# Altium PCB TEST-MODULE.PcbDoc
Units mm, origin at the board's own origin, x right, y up, seen from the top; angles counter-clockwise.
Board outline 70 x 64 mm, 2 copper layers (Top Layer, Bottom Layer), stack 1.571 mm thick; 31 components, 21 nets, 100 pads, 0 vias.
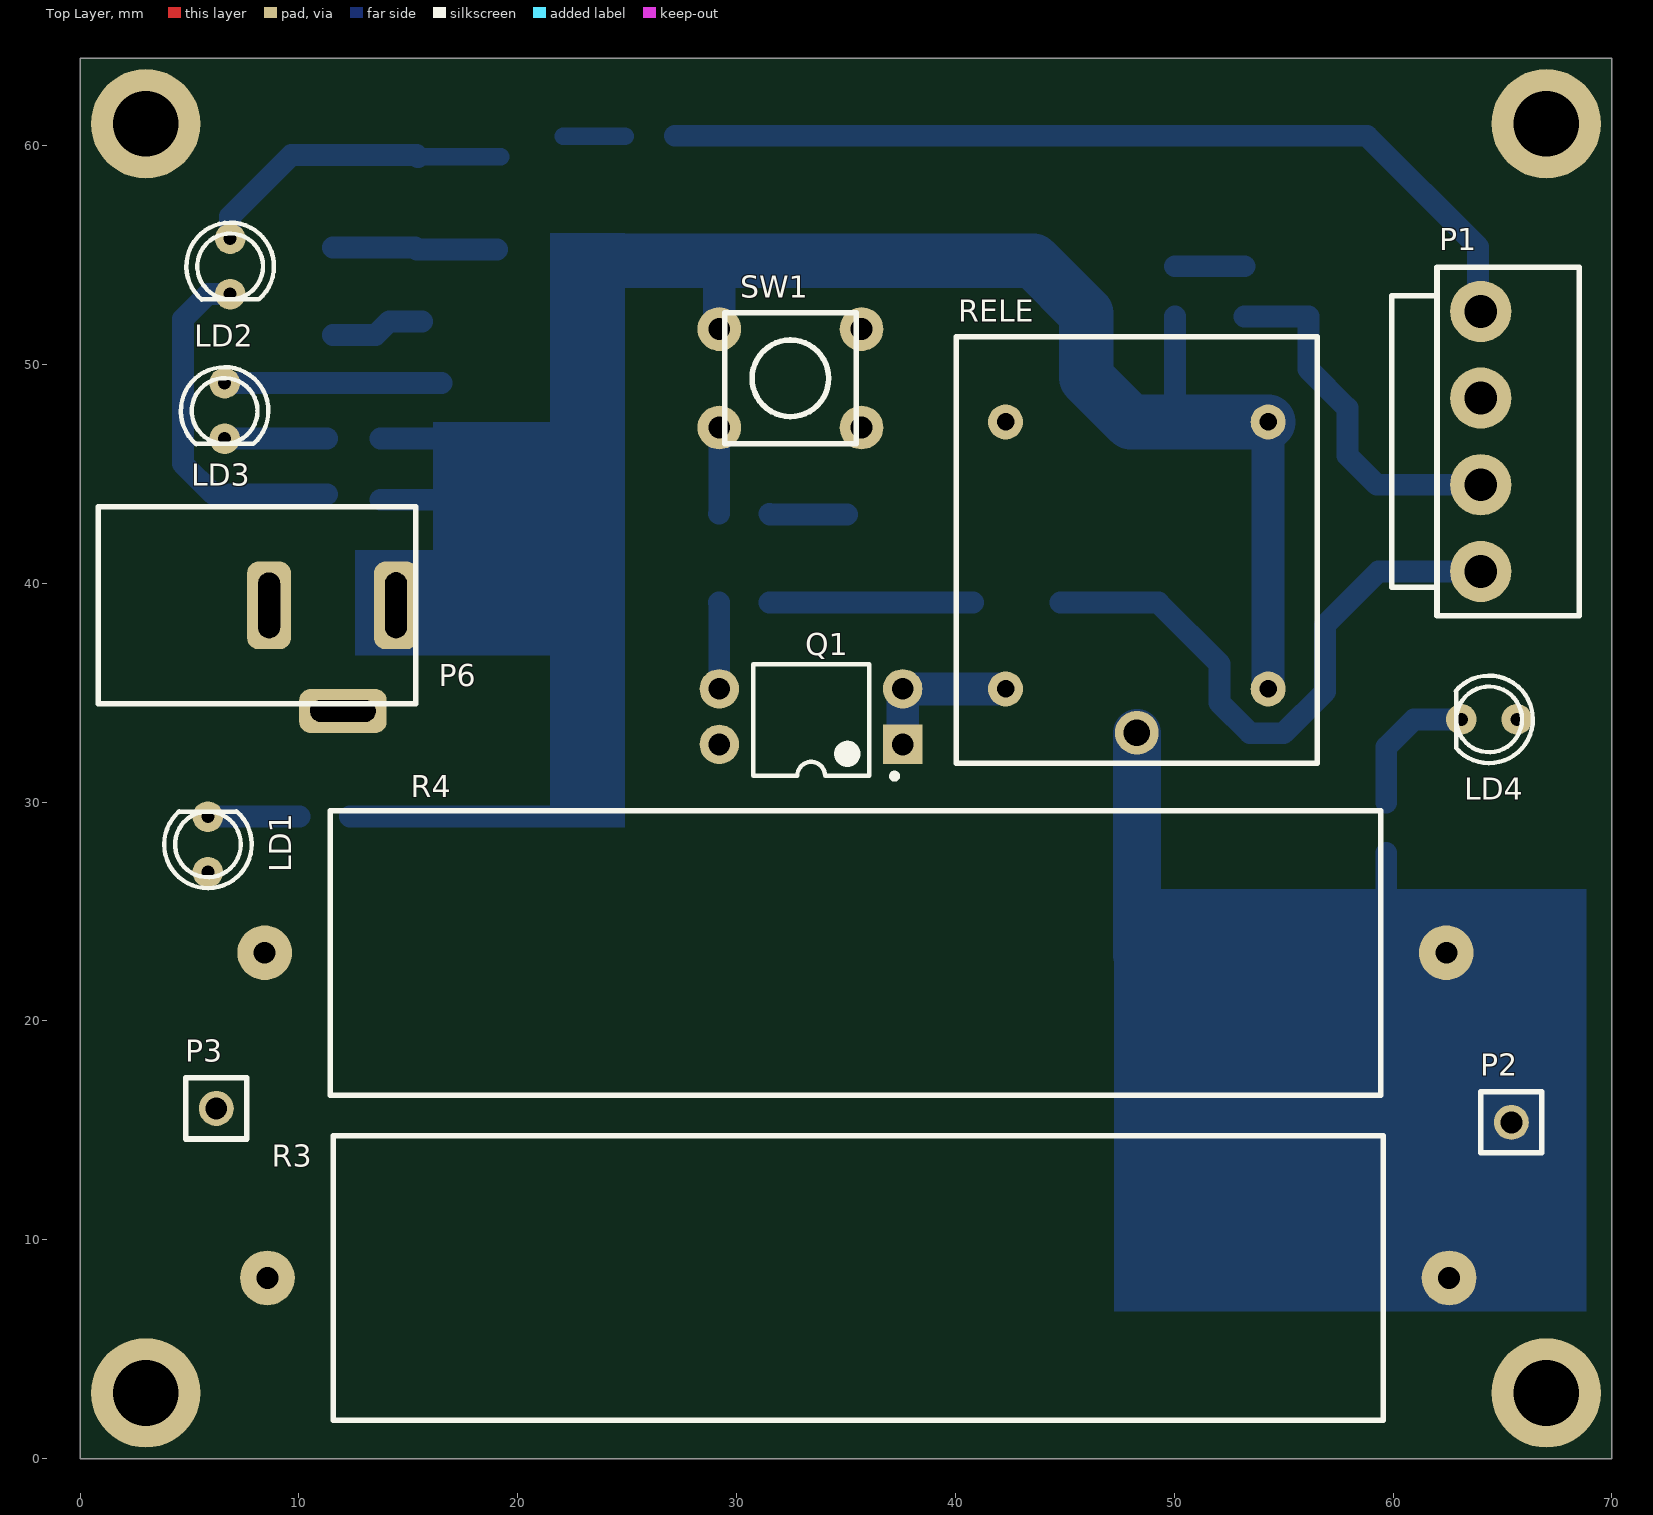
[diagram p0: Top Layer view]
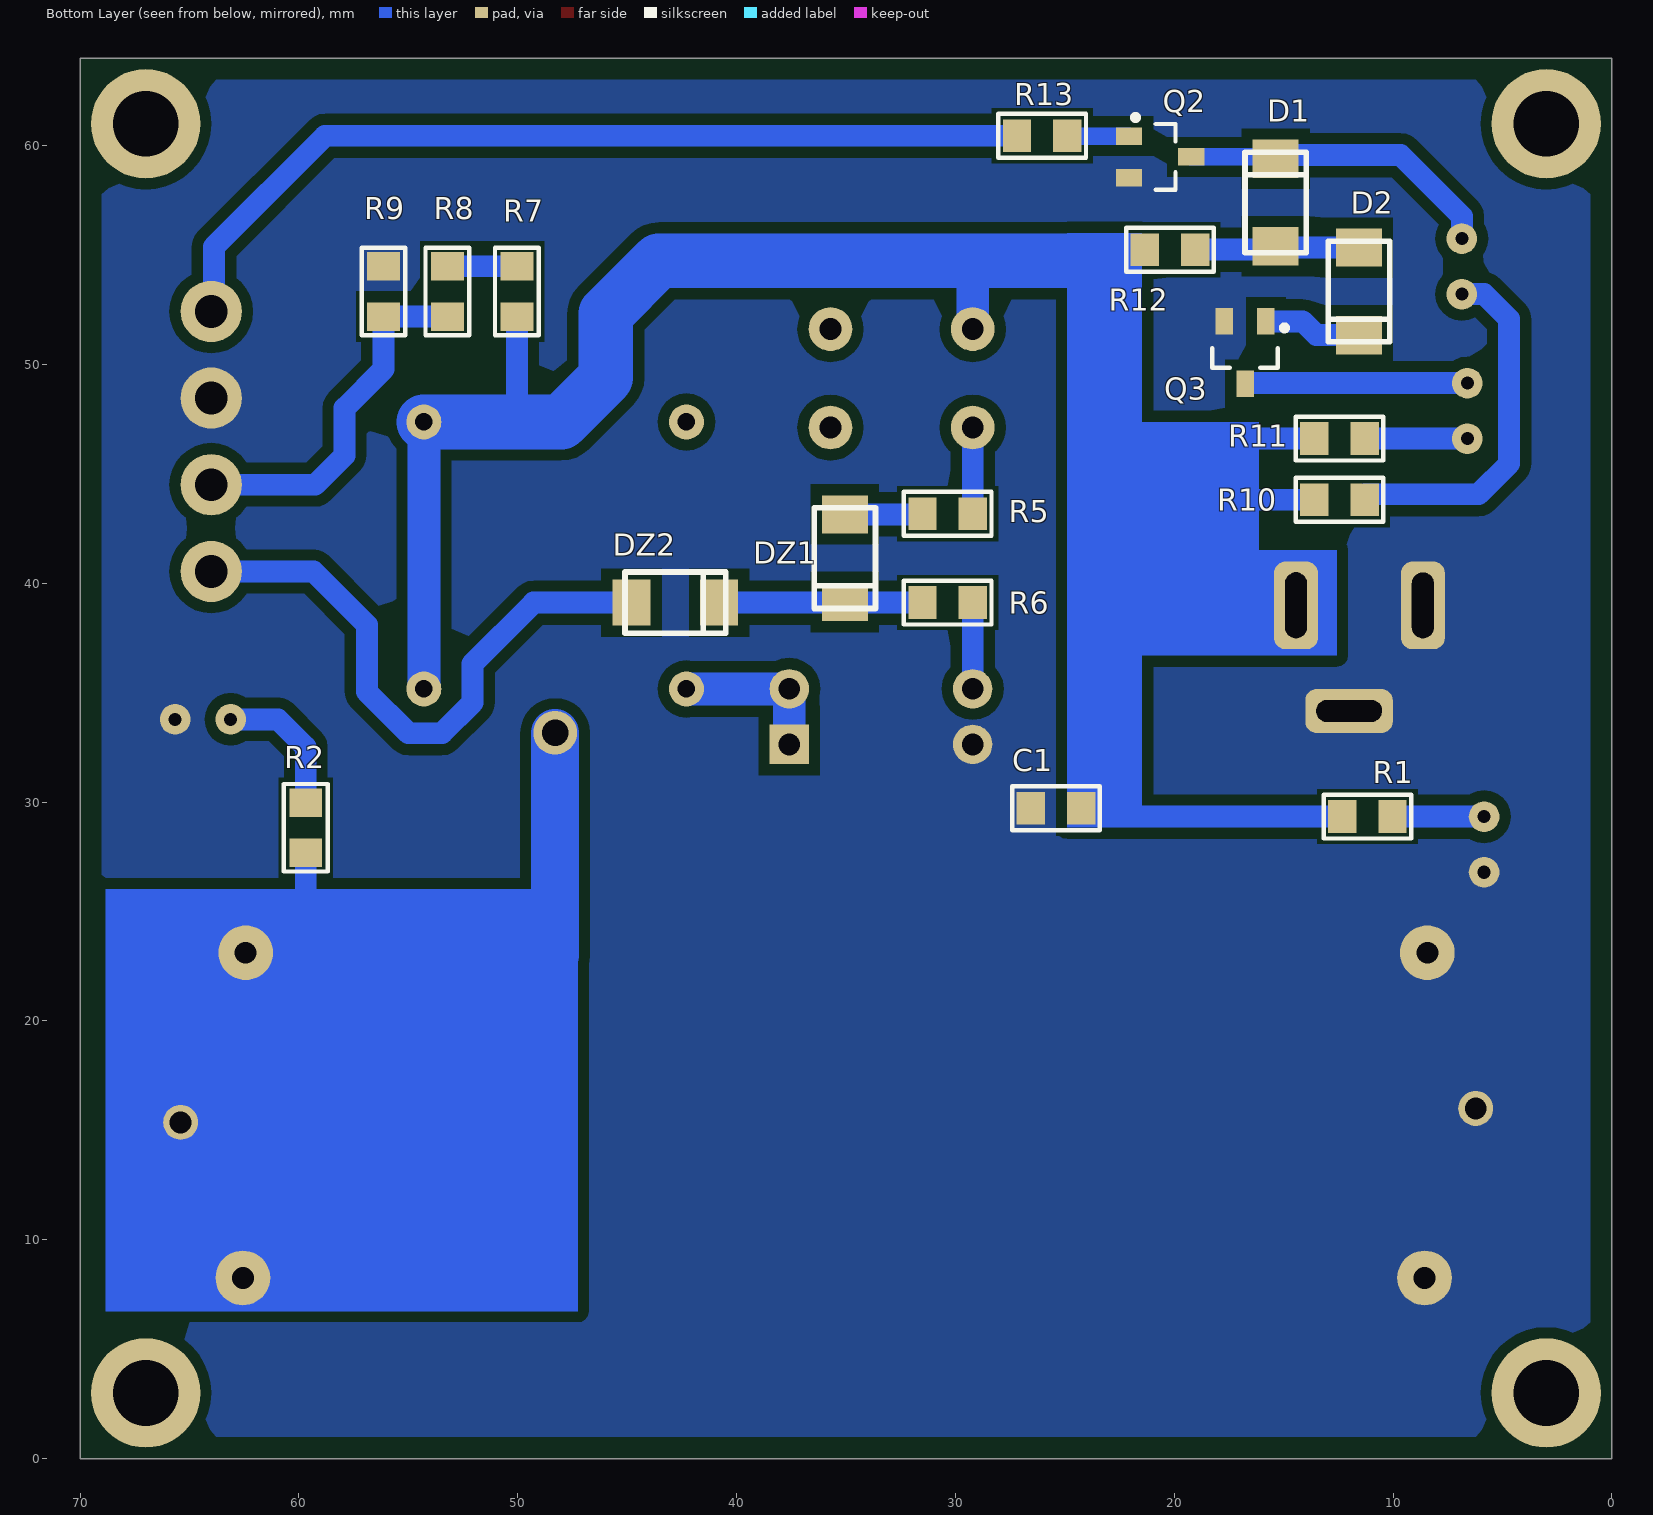
[diagram p1: Bottom Layer view, seen from below]
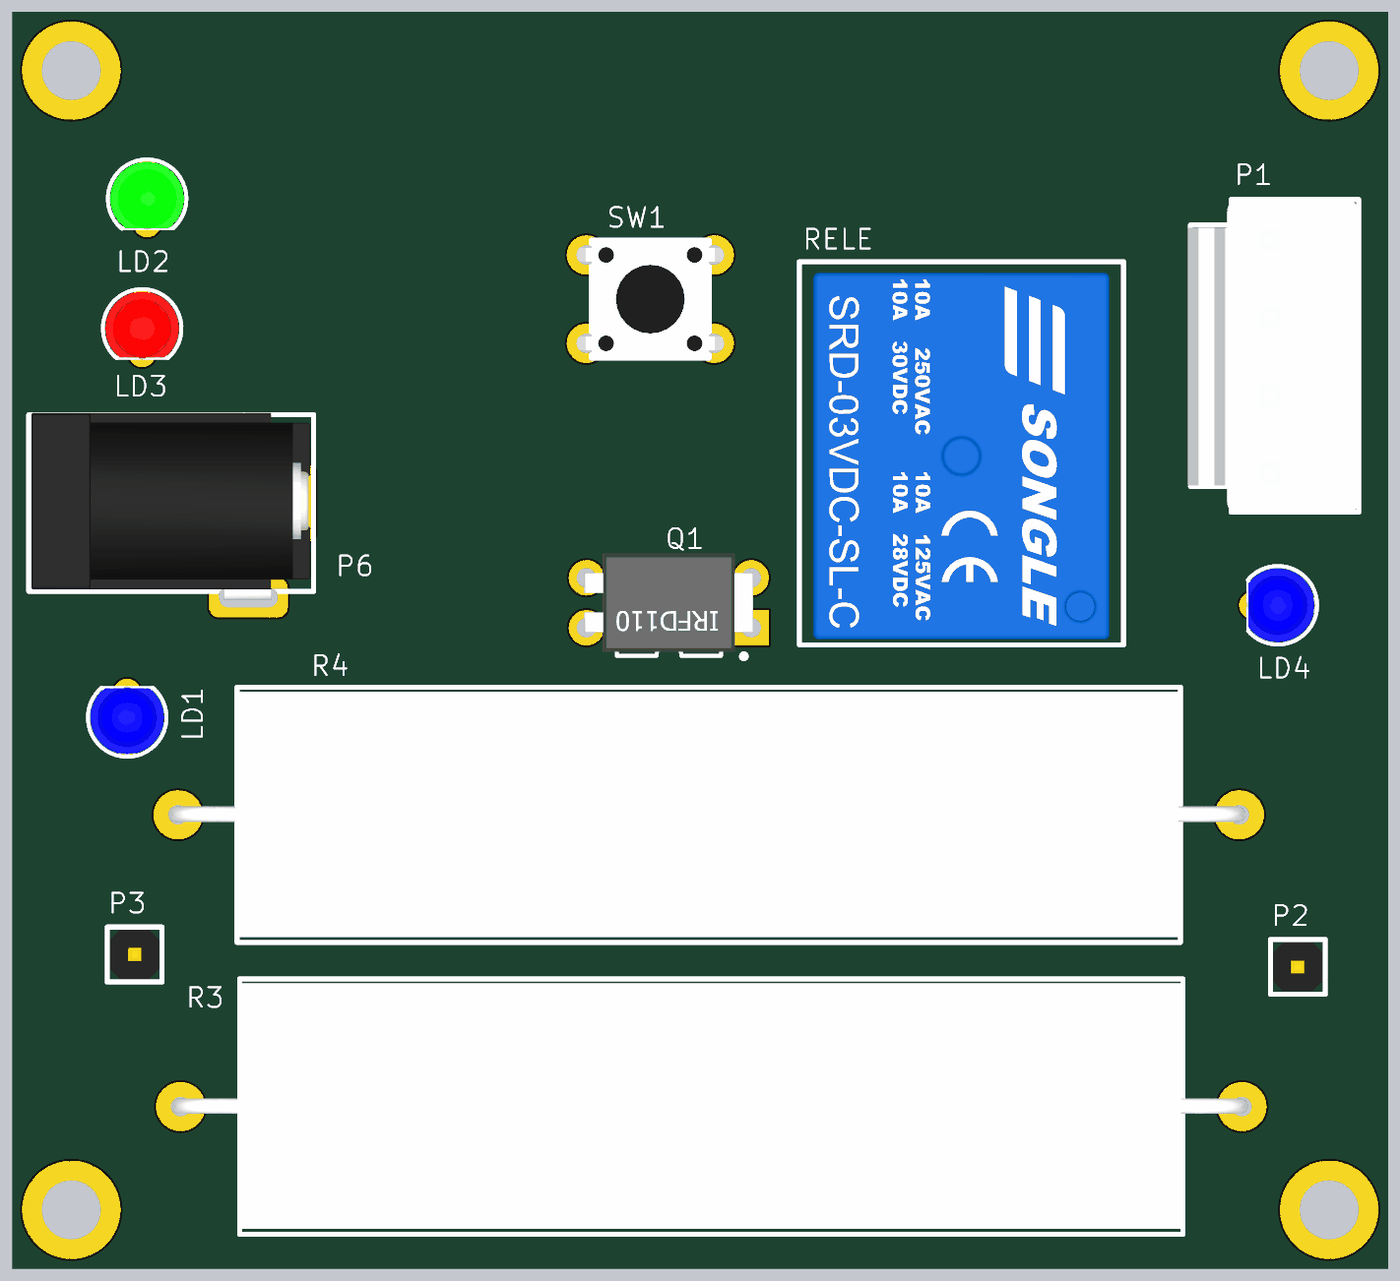
[diagram p2: 3D render of the assembled board from above, using the file's embedded part models]
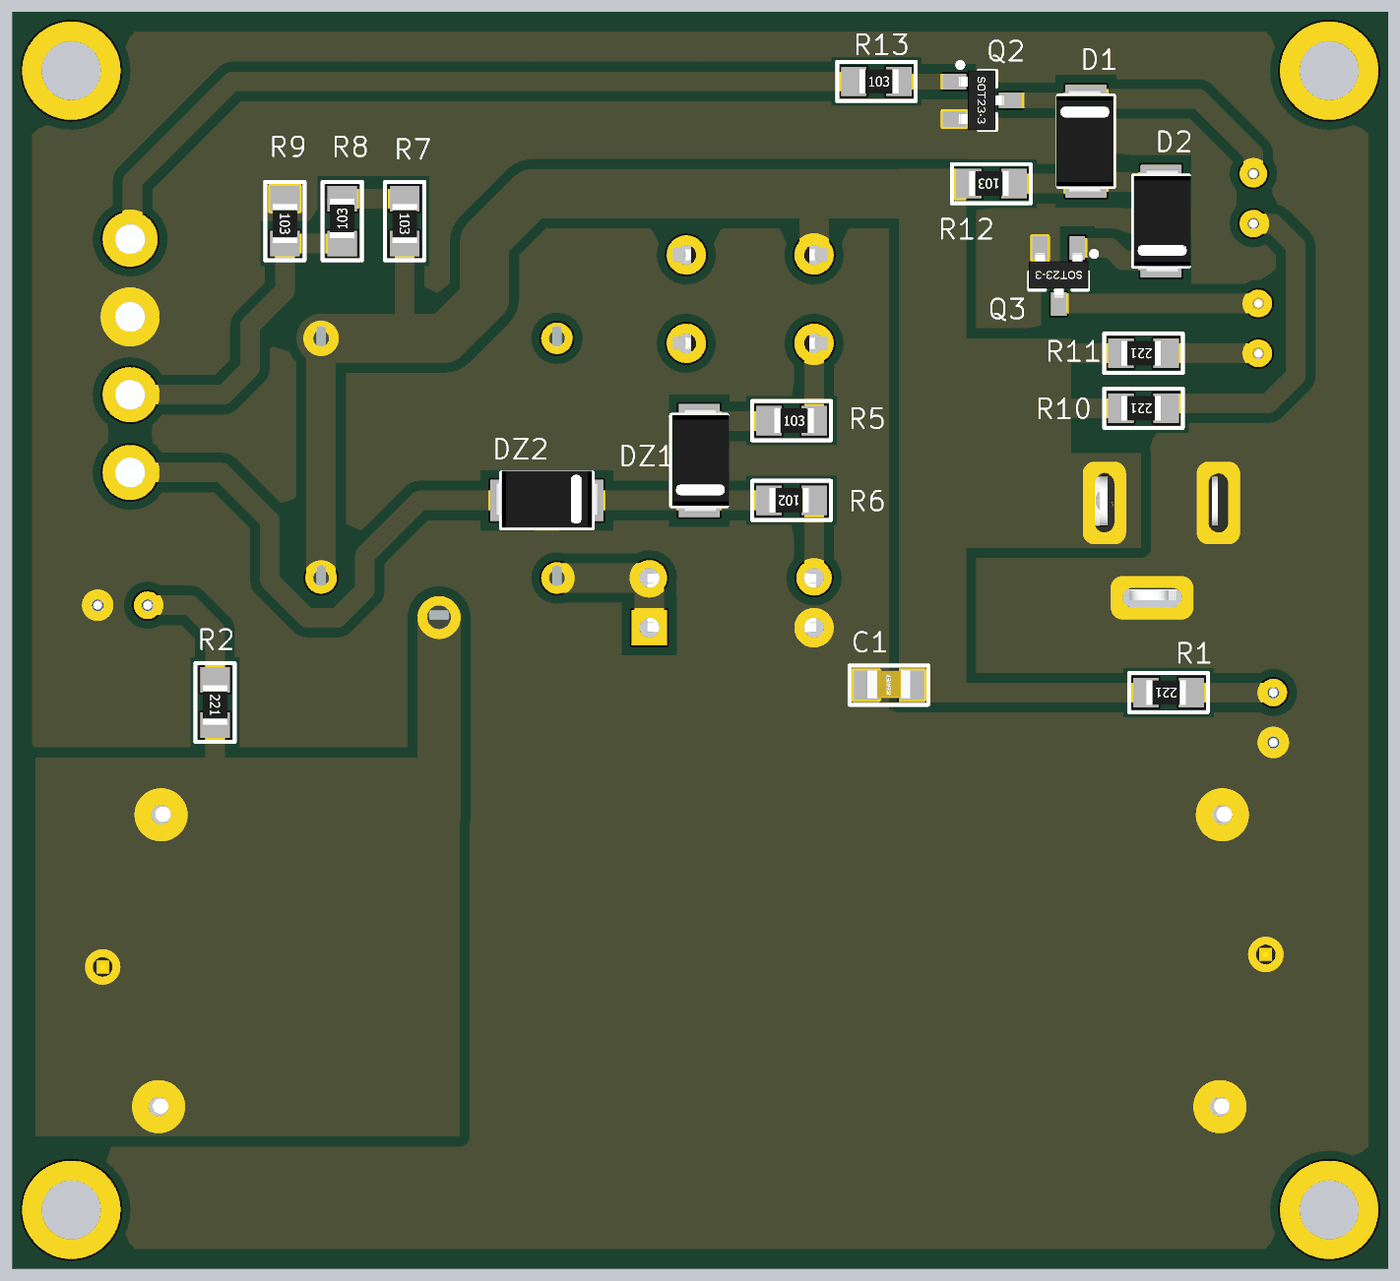
[diagram p3: 3D render of the assembled board from below, using the file's embedded part models]

## Layer stack, top to bottom
Top Solder: solder mask 0.0102, Solder Resist, Dk 3.5
Top Layer: signal copper 0.0356
Dielectric 1: dielectric 1.5, FR-4, Dk 4.8
Bottom Layer: signal copper 0.0356
Bottom Solder: solder mask 0.0102, Solder Resist, Dk 3.5

## Board outline
0,0 70,0 70,64 0,64

## Design rules (kind name [scope] priority, off if disabled: settings)
Clearance [All] p1: gap=0.5 ignorepadtopadclearanceinfootprint=FALSE except(0: Arc-Hole Track-Hole SMDPad-Hole THPad-Hole Via-Hole Fill-Hole Poly-Hole Region-Hole Text-Hole)
PlaneConnect [All] p1: planeconnectstyle=Direct reliefexpansion=0.508 reliefentries=4 reliefconductorwidth=0.254 reliefairgap=0.254
PolygonConnect [All] p1: connectstyle=Direct reliefconductorwidth=0.254 reliefentries=4 polygonreliefangle="90 Angle" airgapwidth=0.254
RoomDefinition TEST-MODULE [InComponentClass('TEST-MODULE')] p1: confinementstyle=ConfineIn formatcopy=TRUE lockcomponents=FALSE outline 70.993,-5.969 267.081,-5.969 267.081,53.721 70.993,53.721
RoutingVias [All] p1: holewidth=0.711 width=1.27 viastyle="Through Hole" minholewidth=0.711 minwidth=1.27 maxholewidth=0.711 maxwidth=1.27
SolderMaskExpansion [All] p1: expansion=0.102
Width [All] p1: maxlimit=5 minlimit=0.5 preferedwidth=1
29 further rules are at their usual default settings.

## Components (designator, comment, footprint, x,y, rotation, side; value= is the part's Value field where it differs from the comment)
C1 "100NFX50V" CAP.SMD.0805 25.4,29.718 r180 bottom
D1 "SS14" Diode-SMD-SMA 15.367,57.404 r270 bottom
D2 "M7" Diode-SMD-SMA 11.557,53.34 r90 bottom
DZ1 "M7 DIODO 1A 1000V SMD-SMA (1N4007) XYG" Diode-SMD-SMA 35.052,41.148 r90 bottom
DZ2 "M7 DIODO 1A 1000V SMD-SMA (1N4007) XYG" Diode-SMD-SMA 42.799,39.116 r0 bottom
LD1 "LED 3MM AZUL" "LED 3MM AZUL" 5.842,28.067 r90 top
LD2 "LED 3MM VERDE" "LED 3MM VERDE" 6.858,54.483 r270 top
LD3 "LED 3MM ROJO" "LED 3MM ROJO" 6.604,47.879 r270 top
LD4 "LED 3MM AZUL" "LED 3MM AZUL" 64.389,33.782 r180 top
P1 "CONECTOR PWXXS MA-04 VERTICAL P=3.96MM PW0" "CONECTOR PWXXS MA-04 VERTICAL P=3.96MM" 64.008,46.482 r90 top
P2 "IDC-MA-THT-1X1-P2.54MM-L11" IDC-MA-THT-1X1-P2.54MM-L11 65.405,15.367 r0 top
P3 "IDC-MA-THT-1X1-P2.54MM-L11" IDC-MA-THT-1X1-P2.54MM-L11 6.223,16.002 r0 top
P6 "DC POWER JACK" VAR-DC-JACK 0.836,38.989 r90 top locked
Q1 "IRFD110" TRA-IRFD110 33.401,33.909 r180 top
Q2 "BC817" NPN.SMD.SOT23 20.645,59.486 r180 bottom
Q3 "BC817" NPN.SMD.SOT23 16.764,50.546 r270 bottom
R1 "220E 5%" RES.SMD.221 11.176,29.337 r0 bottom
R2 "220E" RES.SMD.221 59.69,28.829 r270 bottom
R3 "Resistencia Ceramica 15E 5% 15W SE15 RES.CEM" RES-CERAMICA-15W 35.56,8.255 r0 top
R4 "Resistencia Ceramica 15E 5% 15W SE15 RES.CEM" RES-CERAMICA-15W 35.433,23.114 r0 top locked
R5 "10K" RES.SMD.103 30.353,43.18 r180 bottom
R6 "1K" RES.SMD.102 30.353,39.116 r0 bottom
R7 "10K" RES.SMD.103 50.038,53.34 r270 bottom
R8 "10K" RES.SMD.103 53.213,53.34 r90 bottom
R9 "10K" RES.SMD.103 56.134,53.34 r270 bottom
R10 "220E" RES.SMD.221 12.446,43.815 r0 bottom
R11 "220E" RES.SMD.221 12.446,46.609 r0 bottom
R12 "10K" RES.SMD.103 20.193,55.245 r0 bottom
R13 "10K" RES.SMD.103 26.035,60.452 r180 bottom
RELE "Relay simple inversor 5V 10A" VAR-RELE-5V10A 48.291,33.171 r0 top
SW1 "TACT-SWITCH" TACT-SWITCH-THT-4C-06X06-4.3MM 32.46,49.367 r0 top

## Footprints (in the part's own frame and the unit in brackets; to place one, negate y for a bottom-side part, rotate by r counter-clockwise, add the part's x,y. Pads: shape width x height; smd on the part's side, far side on the other; paste and mask are expansions set on the pad)
CAP.SMD.0805 [mm] "COG 10% CER.MULT. SMD 0805"
  rect 1.3x1.5 smd: 1(-1.15,0) 2(1.15,0)
  silkscreen extent -2,-1 2,1, body extent -1.1,-0.69 1.1,0.76, height 0.88
"CONECTOR PWXXS MA-04 VERTICAL P=3.96MM" [mm] "CONECTOR PWXXS VERTICAL P=3.96MM"
  round 2.8 hole 1.5: 1(-5.94,0) 2(-1.98,0) 3(1.98,0) 4(5.94,0)
  silkscreen extent -7.96,-4.5 7.96,4.06, body extent -7.96,-4.5 7.88,4.2, height 10.7
Diode-SMD-SMA [mm] "Diode-SMD-SMA"
  rect 1.75x2.1 smd: A(2,0) K(-2,0)
  silkscreen extent -2.3,-1.4 2.3,1.4, body extent -2.64,-1.52 2.64,1.4, height 2.41
IDC-MA-THT-1X1-P2.54MM-L11 [mm] "IDC-MA-THT-1X1-P2.54MM-L11"
  round 1.6 hole 1: 1(0,0)
  silkscreen extent -1.4,-1.4 1.4,1.4, body extent -1.25,-1.25 1.25,1.25, height 9.54
"LED 3MM AZUL" [mm] "LED 3MM"
  round 1.4 hole 0.6: A(1.27,0) K(-1.27,0)
  silkscreen extent -2,-2 1.53,2, body extent -1.87,-1.87 1.5,1.87, height 5.49
"LED 3MM ROJO" [mm] "LED 3MM"
  round 1.4 hole 0.6: A(1.27,0) K(-1.27,0)
  silkscreen extent -2,-2 1.53,2, body extent -1.87,-1.87 1.5,1.87, height 5.49
"LED 3MM VERDE" [mm] "LED 3MM"
  round 1.4 hole 0.6: A(1.27,0) K(-1.27,0)
  silkscreen extent -2,-2 1.53,2, body extent -1.87,-1.87 1.5,1.87, height 5.49
NPN.SMD.SOT23 [mm] "Transistor NPN 0.25W SOT23"
  rect 1.2x0.8 smd: 1(-1.425,0.95) 2(-1.425,-0.95) 3(1.425,0)
  silkscreen extent -1.25,-1.5 0.7,1.92, body extent -1.37,-1.52 1.27,1.52, height 0.94
RES-CERAMICA-15W [mm] "Resistenci ceramica 15W"
  round 2.5 hole 1: 1(-27,0) 2(27,0)
  silkscreen extent -24,-6.5 24,6.5, body extent -27.49,-6.22 27.3,6.28, height 12.5
RES.SMD.102 [mm] "5% 0805 1/8W RES.SMD"
  rect 1.3x1.5 smd: 1(-1.15,0) 2(1.15,0)
  silkscreen extent -2,-1 2,1, body extent -0.87,-0.62 1.13,0.63, height 0.48
RES.SMD.103 [mm] "5% 0805 1/8W RES.SMD"
  rect 1.3x1.5 smd: 1(-1.15,0) 2(1.15,0)
  silkscreen extent -2,-1 2,1, body extent -0.87,-0.62 1.13,0.63, height 0.48
RES.SMD.221 [mm] "5% 0805 1/8W RES.SMD"
  rect 1.3x1.5 smd: 1(-1.15,0) 2(1.15,0)
  silkscreen extent -2,-1 2,1, body extent -0.87,-0.62 1.13,0.63, height 0.48
TACT-SWITCH-THT-4C-06X06-4.3MM [mm] "TACT-SWITCH-THT-4C-06X06-4.3MM"
  round 2 hole 1: 1(-3.25,2.25) 2(3.25,2.25) 3(-3.25,-2.25) 4(3.25,-2.25)
  silkscreen extent -3,-3 3,3, body extent -3.94,-3 3.94,3, height 4.3
TRA-IRFD110 [mm] "TRA-IRFD110"
  rect 1.8x1.8 hole 1: 1(-4.191,1.27)
  round 1.8 hole 1: 2(-4.191,-1.27) 3(4.191,-1.27) 4(4.191,1.27)
  silkscreen extent -3.94,-2.4 2.64,2.85, body extent -4.3,-2.5 4.3,2.5, height 4.62
VAR-DC-JACK [mm] "VAR-DC-JACK"
  rrect50% 4x2 hole 1 slot 3 at 0 deg: 1(0,-13.6) 2(0,-7.8)
  rrect50% 2x4 hole 1 slot 3 at 90 deg: 3(-4.826,-11.176)
  silkscreen extent -4.5,-14.5 4.5,0, body extent -4.95,-14.34 4.6,-0.14, height 11
VAR-RELE-5V10A [mm] "Relay 5V 10A"
  round 1.6 hole 0.8: 1(-6,2) 2(6,2) 4(6,14.2) 5(-6,14.2)
  round 2 hole 1.2: 3(0,0)
  silkscreen extent -8.25,-1.4 8.25,18.1, body extent -7.54,-1.14 7.54,17.55, height 14.94

## Part data
C1: library part "Capacitor 100NFX50V X7R 10% CER.MULT. SMD 0805", "100NFX50V X7R 10% CER.MULT. SMD 0805", COD. ELEMON=CA3279774, COD. FV=CE.CAP.0008
D1 D2: library part "Diodo M7 DIODO 1A 1000V SMD-SMA (1N4007) XYG", "M7 DIODO 1A 1000V SMD-SMA (1N4007) XYG", COD. ELEMON=DI1202221
DZ1 DZ2: library part "Diodo M7 DIODO 1A 1000V SMD-SMA (1N4007) XYG", COD. ELEMON=DI1202221
LD1 LD4: library part "LED 3MM AZUL WC SUPER BRILLO 1250mcd 30º 204-10SUBC/C470/S400-A6 PATAS 14MM", "LED 3MM AZUL WC SUPER BRILLO 1250mcd 30º 204-10SUBC/C470/S400-A6 PATAS 14MM", COD. ELEMON=OP1452620
LD2: library part "LED 3MM VERDE WC SUPER BRILLO 15000mcd 26º", "LED 3MM VERDE WC SUPER BRILLO 15000mcd 26º", COD. ELEMON=OP1452540
LD3: library part "LED 3MM ROJO WC SUPER BRILLO 2000mcd 26º", "LED 3MM ROJO WC SUPER BRILLO 2000mcd 26º", COD. ELEMON=OP1452500
P1: library part "CONECTOR PWXXS MA-04 VERTICAL P=3.96MM PW04S", COD. ELEMON=CO5052040, COD. FV=CE.CON.0013
P6: library part "DC POWER JACK 90 GRA. 2MM", "DC POWER JACK 90 GRA. 2MM", COD. ELEMON=MC6691355
Q1: library part "Transistor MOSFET N IRFD110", "Transistor MOSFET N IRFD110", COD. FV=CE.TRA.0003
Q2 Q3: library part "Transistor BC817-40 TRA.NPN 45V0.5A 0.25W SOT23", "BC817-40 TRA.NPN 45V0.5A 0.25W SOT23", COD. ELEMON=TR1723020, COD. FV=CE.TRA.0002
R1 R2 R10 R11: library part "Resistencia 220E 5% 0805 1/8W", "220E 5% 0805 1/8W RES.SMD", COD. ELEMON=RS3896145
R5 R7 R8 R9 R12 R13: library part "Resistencia 10K 5% 0805 1/8W", "10K 5% 0805 1/8W RES.SMD", COD. ELEMON=RS3896245, COD. FV=CE.RES.0014
R6: library part "Resistencia 1K 5% 0805 1/8W", "1K 5% 0805 1/8W RES.SMD", COD. ELEMON=RS3896185, COD. FV=CE.RES.0012
RELE: library part "VAR-RELE-5V Relay simple inversor 5V 10A", COD. SYC=NT73-05
SW1: library part TACT-SWITCH-THT-4C-06X06(4.3MM)-JIANFU, "TACT-SWITCH-THT-4C-06X06(4.3MM)-JIANFU", COD. ELEMON=SW5702091
P2 P3: COD. ELEMON=CO496C20
R3 R4: COD. ELEMON=RS4176075

## Free pads (board coordinates)
  round 5 hole 3: 12(3,3) 12(3,61) 12(67,3) 12(67,61)
  round 1.524 hole 0.762: 29(8.597,38.614) 29(8.601,37.933) 29(8.605,38.269) 29(8.609,38.874) 29(8.609,39.387) 29(8.613,39.122) 29(8.625,39.707) 29(8.636,40.116) 29(10.88,34.251) 29(11.289,34.239) 29(11.61,34.223) 29(11.874,34.227) 29(12.122,34.223) 29(12.383,34.211) 29(12.727,34.219) 29(13.063,34.215) 29(14.395,38.638) 29(14.399,37.957) 29(14.403,38.294) 29(14.407,38.898) 29(14.407,39.411) 29(14.411,39.147) 29(14.423,39.731) 29(14.435,40.14)

## Nets (pads, with @x,y where several pads share a name; then routed paths per layer and width w, separated by ;. In a path a pad name is that pad's centre, name@x,y a point inside that pad or via, vN(x,y) a via of type N, cw(c..) or ccw(c..) an arc to the next point about the centre after c; other vN are vias at no path point)
12V: C1.2 P6.1 pad.29@14.395,38.638 pad.29@14.399,37.957 pad.29@14.403,38.294 pad.29@14.407,38.898 pad.29@14.407,39.411 pad.29@14.411,39.147 pad.29@14.423,39.731 pad.29@14.435,40.14 R1.2 R7.2 R10.2 R11.2 R12.2 RELE.2 RELE.4 SW1.1 | length 74.6
  Bottom Layer w1: R1.2 C1.2@23.622,29.337 ; R10.2@13.723,43.815 17.399,43.815 ; R11.2@13.723,46.609 17.272,46.609 ; R7.2 50.038,47.498 50.165,47.371
  Bottom Layer w1.5: 29.083,54.737 29.21,54.61 SW1.1 ; RELE.2 RELE.4
  Bottom Layer w2.5: 23.241,54.737 43.561,54.737 45.974,52.324 45.974,49.403 48.006,47.371 50.165,47.371 RELE.4
ACT: DZ2.A P1.1 | length 27.6
  Bottom Layer w1: DZ2.A 49.276,39.116 52.07,36.322 52.07,34.544 53.467,33.147 54.991,33.147 56.896,35.052 56.896,38.1 59.338,40.542 P1.1
GND: C1.1 LD1.K LD4.K P1.3 P3.1 P6.2 P6.3 pad.29@8.597,38.614 pad.29@8.601,37.933 pad.29@8.605,38.269 pad.29@8.609,38.874 pad.29@8.609,39.387 pad.29@8.613,39.122 pad.29@8.625,39.707 pad.29@8.636,40.116 pad.29@10.88,34.251 pad.29@11.61,34.223 pad.29@11.289,34.239 pad.29@11.874,34.227 pad.29@12.122,34.223 pad.29@12.383,34.211 pad.29@12.727,34.219 pad.29@13.063,34.215 Q1.4 Q2.2 Q3.2 R3.1 R4.1 R9.1
NetD1_A: D1.A D2.A R12.1 | length 7.5
  Bottom Layer w1: D2.A 15.303,55.34 15.398,55.245 R12.1
NetD1_K: D1.K LD2.K Q2.3 | length 14.6
  Bottom Layer w0.8: D1.K@15.444,59.486 Q2.3
  Bottom Layer w1: LD2.K 6.858,56.769 9.652,59.563 15.367,59.563 D1.K@15.444,59.486
NetD2_K: D2.K Q3.1 | length 4.3
  Bottom Layer w1: D2.K 13.494,51.34 14.125,51.971 Q3.1@15.621,51.971
NetDZ1_A: DZ1.A R5.1 | length 3.6
  Bottom Layer w1: R5.1 31.535,43.148 DZ1.A
NetDZ1_K: DZ1.K DZ2.K R6.2 | length 9.3
  Bottom Layer w1: R6.2 DZ2.K
NetLD1_A: LD1.A R1.1 | length 4.2
  Bottom Layer w1: LD1.A R1.1
NetLD2_A: LD2.A R10.1 | length 16.4
  Bottom Layer w1: LD2.A 5.842,53.213 4.699,52.07 4.699,45.466 6.096,44.069 R10.1@11.296,44.069
NetLD3_A: LD3.A R11.1 | length 4.7
  Bottom Layer w1: LD3.A R11.1
NetLD3_K: LD3.K Q3.3 | length 9.9
  Bottom Layer w1: LD3.K Q3.3@16.51,49.149
NetLD4_A: LD4.A R2.1 | length 6.5
  Bottom Layer w1: R2.1 59.69,32.512 60.96,33.782 LD4.A
NetP2_1: P2.1 R2.2 R3.2 R4.2 RELE.3 | length 14
  Bottom Layer w1: 48.006,22.733 48.291,23.018 ; R2.2 59.69,24.384 59.817,24.257
  Bottom Layer w2.2: 48.291,23.018 RELE.3@48.291,33.147
NetQ1_1: Q1.1 Q1.2 RELE.1 | length 7.2
  Bottom Layer w1: Q1.2 Q1.2@37.6,35.171
  Bottom Layer w1.5: Q1.1 Q1.2 ; Q1.2@37.6,35.171 RELE.1
NetQ1_3: Q1.3 R6.1 | length 3.9
  Bottom Layer w1: R6.1 29.21,39.109 Q1.3
NetQ2_1: Q2.1 R13.2 | length 2.8
  Bottom Layer w0.8: Q2.1 R13.2@24.901,60.436
NetR5_2: R5.2 SW1.3 | length 3.9
  Bottom Layer w1: R5.2 29.21,43.187 SW1.3 SW1.3@29.203,47.11
NetR7_1: R7.1 R8.2 | length 3.2
  Bottom Layer w1: R7.1 R8.2
STA: P1.4 R13.1 | length 42
  Bottom Layer w1: R13.1 58.801,60.452 63.881,55.372 P1.4@63.881,52.197
VIN: P1.2 R8.1 R9.2 | length 16.7
  Bottom Layer w1: R8.1 R9.2 56.134,49.784 57.912,48.006 57.912,45.847 59.257,44.502 P1.2
pads on no net: RELE.5 SW1.2 SW1.4

## Polygon pours and split planes (outlines as drawn)
GND on Bottom Layer "Top Layer-No Net" (solid, pour order 4): 1,63 69,63 69,1 1,1

## Other copper
Bottom Layer:
  rectangle net NetP2_1: 47.244,6.731 68.834,26.035
  rectangle net 12V: 12.573,36.703 23.368,41.529
  rectangle net 12V: 16.129,40.64 21.717,47.371
  rectangle net 12V: 21.463,28.829 24.892,56.007

## Silkscreen, mask and mechanical layers (free items; w line width, h text height)
Mechanical 1:
  the board outline again, w0.254

## Dimensions
0,64 to 0,0 on Mechanical 1
0,64 to 70,64 on Mechanical 1